# Altium PCB 8x8x8 LED Cube.PcbDoc
Units mil, origin at the board's own origin, x right, y up, seen from the top; angles counter-clockwise.
Board outline 5000 x 7260 mil, 2 copper layers (Top Layer, Bottom Layer); 117 components, 176 nets, 512 pads, 77 vias.
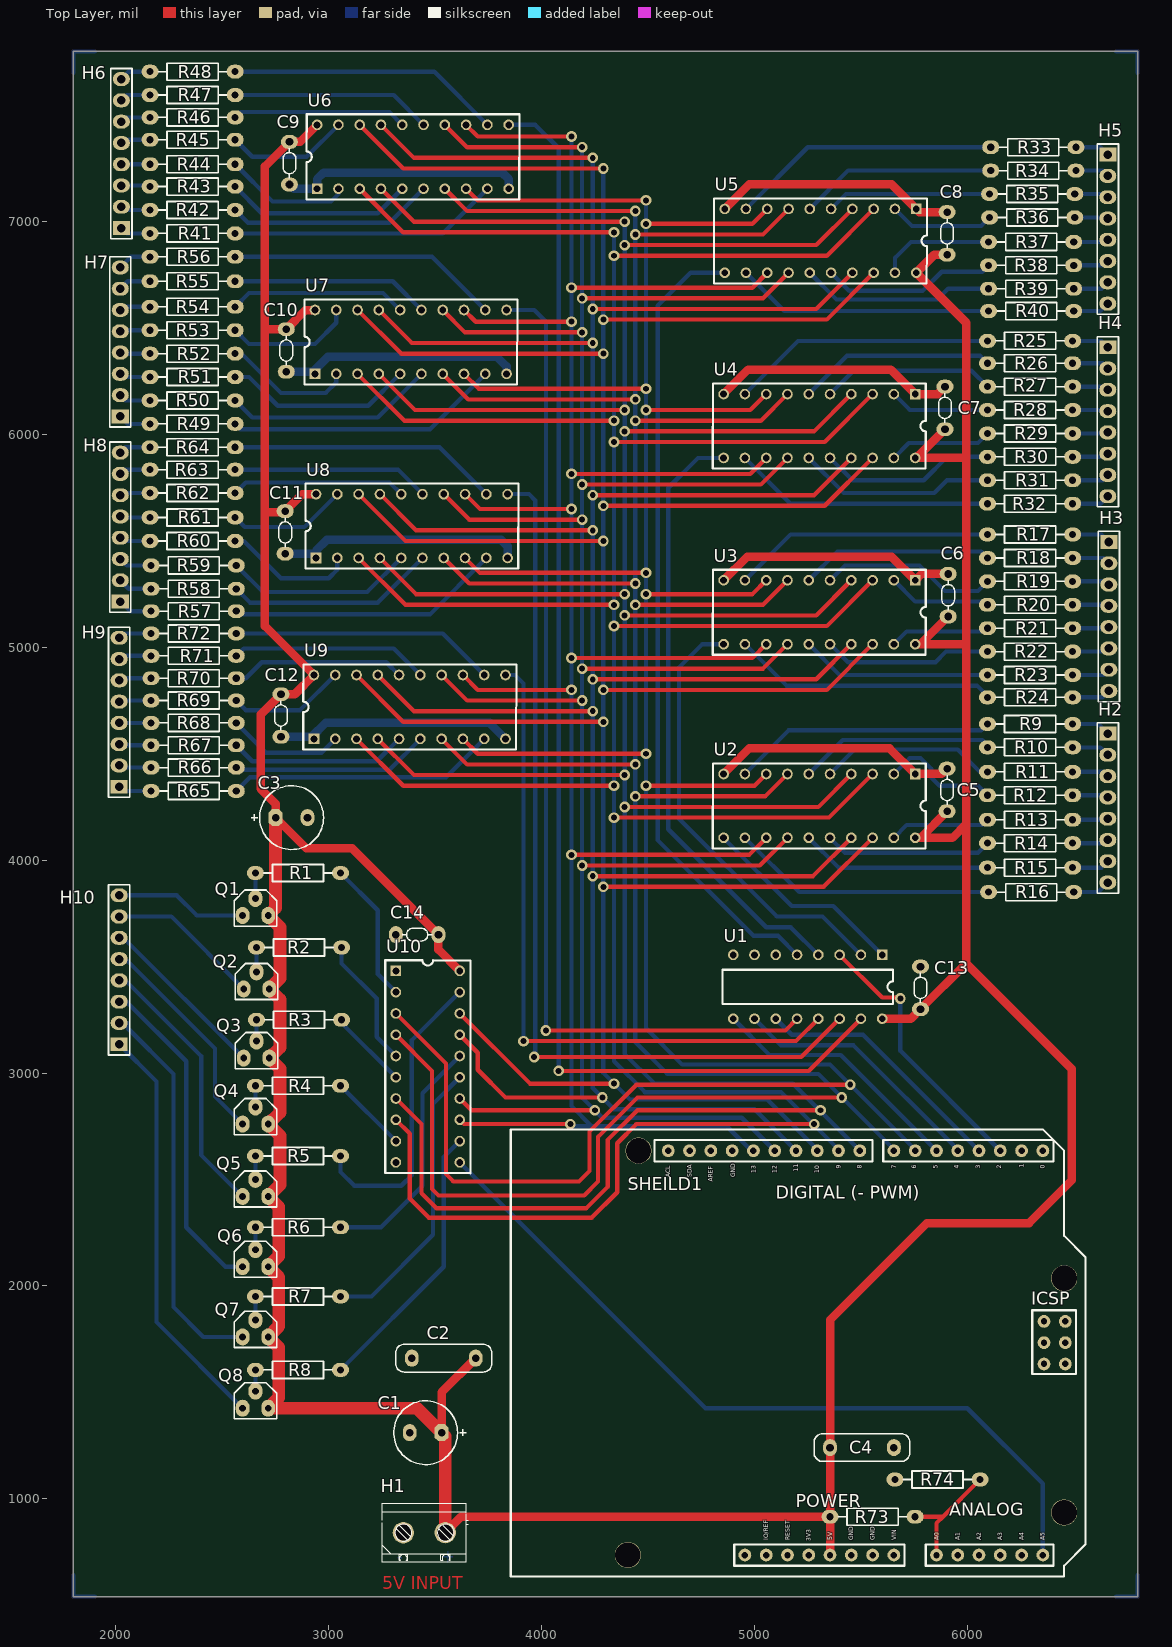
[diagram p0: Top Layer view]
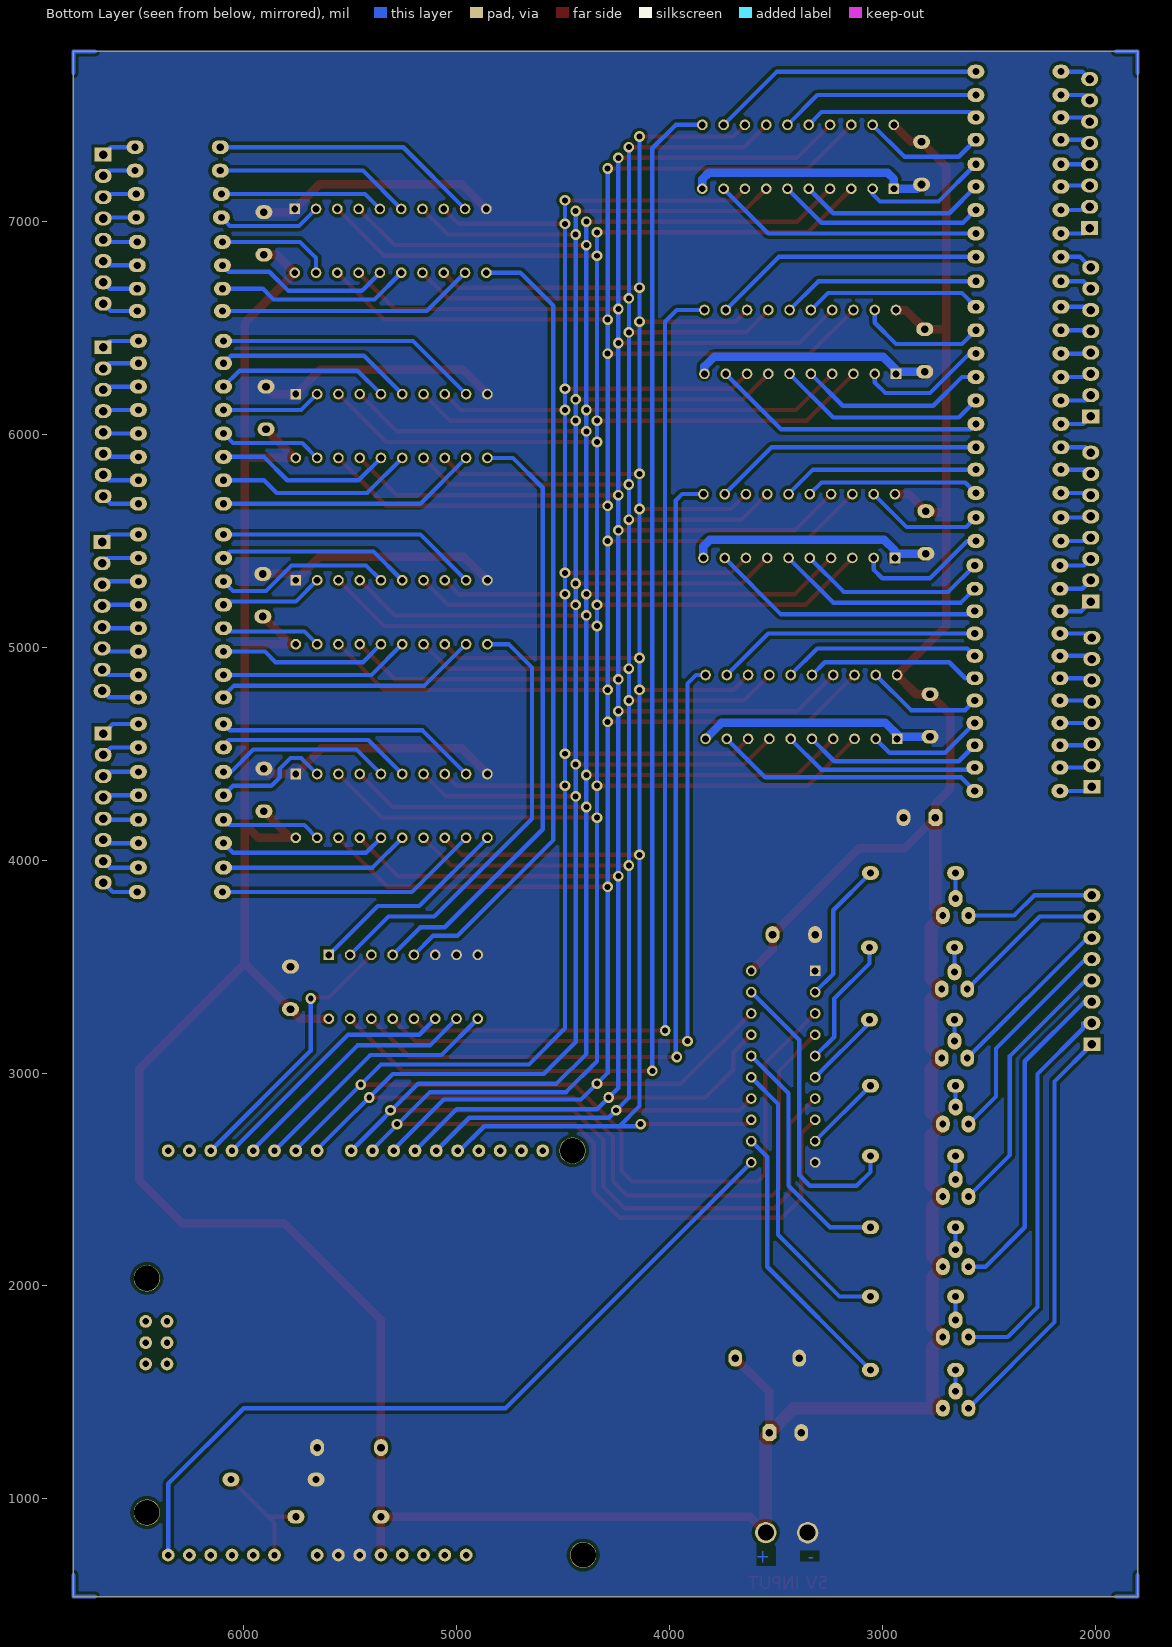
[diagram p1: Bottom Layer view, seen from below]

## Layer stack, top to bottom
Top Layer: signal copper 1.4
Dielectric: dielectric 12.6, FR-4, Dk 4.8
Bottom Layer: signal copper 1.4

## Board outline
1800,7800 6800,7800 6800,540 1800,540

## Design rules (kind name [scope] priority, off if disabled: settings)
Clearance [All] p1: gap=15
PlaneConnect [All] p1: planeconnectstyle=Relief reliefexpansion=20 reliefentries=4 reliefconductorwidth=12 reliefairgap=10
PolygonConnect [All] p1: connectstyle=Direct reliefconductorwidth=10 reliefentries=4 polygonreliefangle="90 Angle"
RoutingVias [All] p1: holewidth=28 width=50 viastyle="Through Hole" minholewidth=28 minwidth=50 maxholewidth=28 maxwidth=50
SilkscreenOverComponentPads [All] p1: minsilkscreentomaskgap=10
SolderMaskExpansion [All] p1: expansion=4
Width GND [InNet('GND')] p1: maxlimit=100 minlimit=20 preferedwidth=40
Width VCC [InNet('VCC')] p2: maxlimit=80 minlimit=20 preferedwidth=40
Width [All] p3: maxlimit=40 minlimit=10 preferedwidth=20
26 further rules are at their usual default settings.

## Components (designator, comment, footprint, x,y, rotation, side; value= is the part's Value field where it differs from the comment)
C1 "Cap Pol1" RB.15/.3 3530,1310 r180 top
C2 "Cap" RAD300 3690,1660 r180 top
C3 "Cap Pol1" RB.15/.3 2750,4200 r0 top
C4 "Cap" RAD300 5655,1240 r180 top
C5 "Cap" RAD200_A 5905,4430 r270 top
C6 "Cap" RAD200_A 5910,5345 r270 top
C7 "Cap" RAD200_A 5895,6225 r270 top
C8 "Cap" RAD200_A 5905,7045 r270 top
C9 "Cap" RAD200_A 2815,7175 r90 top
C10 "Cap" RAD200_A 2800,6295 r90 top
C11 "Cap" RAD200_A 2795,5440 r90 top
C12 "Cap" RAD200_A 2775,4580 r90 top
C13 "Cap" RAD200_A 5780,3500 r270 top
C14 "Cap" RAD200_A 3315,3650 r0 top
H1 "PRKR2" PRKR2 3350,840 r270 top
H2 "Header 98" HDR1X8 6660,4595 r270 top
H3 "Header 98" HDR1X8 6665,5495 r270 top
H4 "Header 98" HDR1X8 6660,6410 r270 top
H5 "Header 98" HDR1X8 6660,7315 r270 top
H6 "Header 98" HDR1X8 2025,6970 r90 top
H7 "Header 98" HDR1X8 2020,6085 r90 top
H8 "Header 98" HDR1X8 2020,5215 r90 top
H9 "Header 98" HDR1X8 2015,4345 r90 top
H10 "Header 98" HDR1X8 2015,3135 r90 top
Q1 "BC327-16" TO-92A 2655,3810 r180 top
Q2 "BC327-16" TO-92A 2660,3465 r180 top
Q3 "BC327-16" TO-92A 2660,3140 r180 top
Q4 "BC327-16" TO-92A 2655,2830 r180 top
Q5 "BC327-16" TO-92A 2655,2490 r180 top
Q6 "BC327-16" TO-92A 2655,2160 r180 top
Q7 "BC327-16" TO-92A 2655,1830 r180 top
Q8 "BC327-16" TO-92A 2655,1495 r180 top
R1 "Res1" AXIAL400 2855,3940 r180 top
R2 "Res1" AXIAL400 2860,3590 r180 top
R3 "Res1" AXIAL400 2860,3250 r180 top
R4 "Res1" AXIAL400 2855,2940 r180 top
R5 "Res1" AXIAL400 2855,2610 r180 top
R6 "Res1" AXIAL400 2855,2275 r180 top
R7 "Res1" AXIAL400 2855,1950 r180 top
R8 "Res1" AXIAL400 2855,1605 r180 top
R9 "Res1" AXIAL400 6295,4640 r180 top
R10 "Res1" AXIAL400 6295,4530 r180 top
R11 "Res1" AXIAL400 6295,4415 r180 top
R12 "Res1" AXIAL400 6295,4305 r180 top
R13 "Res1" AXIAL400 6295,4190 r180 top
R14 "Res1" AXIAL400 6295,4080 r180 top
R15 "Res1" AXIAL400 6295,3965 r180 top
R16 "Res1" AXIAL400 6300,3850 r180 top
R17 "Res1" AXIAL400 6295,5530 r180 top
R18 "Res1" AXIAL400 6295,5420 r180 top
R19 "Res1" AXIAL400 6295,5310 r180 top
R20 "Res1" AXIAL400 6295,5200 r180 top
R21 "Res1" AXIAL400 6295,5090 r180 top
R22 "Res1" AXIAL400 6295,4980 r180 top
R23 "Res1" AXIAL400 6295,4870 r180 top
R24 "Res1" AXIAL400 6295,4765 r180 top
R25 "Res1" AXIAL400 6295,6440 r180 top
R26 "Res1" AXIAL400 6295,6335 r180 top
R27 "Res1" AXIAL400 6295,6225 r180 top
R28 "Res1" AXIAL400 6295,6115 r180 top
R29 "Res1" AXIAL400 6295,6005 r180 top
R30 "Res1" AXIAL400 6295,5895 r180 top
R31 "Res1" AXIAL400 6295,5785 r180 top
R32 "Res1" AXIAL400 6295,5675 r180 top
R33 "Res1" AXIAL400 6310,7350 r180 top
R34 "Res1" AXIAL400 6310,7240 r180 top
R35 "Res1" AXIAL400 6305,7130 r180 top
R36 "Res1" AXIAL400 6305,7020 r180 top
R37 "Res1" AXIAL400 6300,6905 r180 top
R38 "Res1" AXIAL400 6300,6795 r180 top
R39 "Res1" AXIAL400 6300,6685 r180 top
R40 "Res1" AXIAL400 6300,6580 r180 top
R41 "Res1" AXIAL400 2360,6945 r0 top
R42 "Res1" AXIAL400 2360,7055 r0 top
R43 "Res1" AXIAL400 2360,7165 r0 top
R44 "Res1" AXIAL400 2360,7270 r0 top
R45 "Res1" AXIAL400 2360,7385 r0 top
R46 "Res1" AXIAL400 2360,7490 r0 top
R47 "Res1" AXIAL400 2360,7595 r0 top
R48 "Res1" AXIAL400 2360,7705 r0 top
R49 "Res1" AXIAL400 2360,6050 r0 top
R50 "Res1" AXIAL400 2360,6160 r0 top
R51 "Res1" AXIAL400 2360,6270 r0 top
R52 "Res1" AXIAL400 2360,6380 r0 top
R53 "Res1" AXIAL400 2360,6490 r0 top
R54 "Res1" AXIAL400 2360,6600 r0 top
R55 "Res1" AXIAL400 2360,6720 r0 top
R56 "Res1" AXIAL400 2360,6835 r0 top
R57 "Res1" AXIAL400 2365,5170 r0 top
R58 "Res1" AXIAL400 2365,5275 r0 top
R59 "Res1" AXIAL400 2365,5385 r0 top
R60 "Res1" AXIAL400 2360,5500 r0 top
R61 "Res1" AXIAL400 2360,5610 r0 top
R62 "Res1" AXIAL400 2360,5725 r0 top
R63 "Res1" AXIAL400 2360,5835 r0 top
R64 "Res1" AXIAL400 2360,5940 r0 top
R65 "Res1" AXIAL400 2365,4325 r0 top
R66 "Res1" AXIAL400 2365,4435 r0 top
R67 "Res1" AXIAL400 2365,4540 r0 top
R68 "Res1" AXIAL400 2365,4645 r0 top
R69 "Res1" AXIAL400 2365,4750 r0 top
R70 "Res1" AXIAL400 2365,4855 r0 top
R71 "Res1" AXIAL400 2365,4960 r0 top
R72 "Res1" AXIAL400 2365,5065 r0 top
R73 "Res1" AXIAL400 5555,915 r180 top
R74 "Res1" AXIAL400 5860,1090 r0 top
SHEILD1 "Arduino UNO sheild" "Arduino UNO R3" 3855,635 r0 top
U1 "CD4051 - 8 channel analog multiplexer" DIP16 5600,3555 r270 top
U2 "HEF40373BP - Ocatal D type latch" DIP20 5755,4405 r270 top
U3 "HEF40373BP - Ocatal D type latch" DIP20 5755,5315 r270 top
U4 "HEF40373BP - Ocatal D type latch" DIP20 5755,6190 r270 top
U5 "HEF40373BP - Ocatal D type latch" DIP20 5760,7060 r270 top
U6 "HEF40373BP - Ocatal D type latch" DIP20 2945,7155 r90 top
U7 "HEF40373BP - Ocatal D type latch" DIP20 2935,6285 r90 top
U8 "HEF40373BP - Ocatal D type latch" DIP20 2940,5420 r90 top
U9 "HEF40373BP - Ocatal D type latch" DIP20 2930,4570 r90 top
U10 "HEF40373BP - Ocatal D type latch" DIP20 3315,3480 r0 top

## Footprints (in the part's own frame and the unit in brackets; to place one, negate y for a bottom-side part, rotate by r counter-clockwise, add the part's x,y. Pads: shape width x height; smd on the part's side, far side on the other; paste and mask are expansions set on the pad)
"Arduino UNO R3" [mil]
  round 60 hole 30: 1(1100,100) 2(1200,100) 3(1300,100) 4(1400,100) 5(1500,100) 6(1600,100) 7(1700,100) 8(1800,100) 9(2000,100) 10(2100,100) 11(2200,100) 12(2300,100) 13(2400,100) 14(2500,100) 15(2500,2000) 16(2400,2000) 17(2300,2000) 18(2200,2000) 19(2100,2000) 20(2000,2000) 21(1900,2000) 22(1800,2000) 23(1640,2000) 24(1540,2000) 25(1440,2000) 26(1340,2000) 27(1240,2000) 28(1140,2000) 29(1040,2000) 30(940,2000) 31(840,2000) 32(740,2000) 33(2505.51,998.03) 34(2605.51,998.03) 35(2505.51,1098.03) 36(2605.51,1098.03) 37(2605.51,1198.03) 38(2505.51,1198.03)
  round 123 hole 119: 39(550,100) 40(2600,300) 41(2600,1400) 42(600,2000)
  silkscreen extent 0,0 2700,2100
AXIAL400 [mil]
  oval 80x65 hole 33.46: 1(-200,0) 2(200,0)
  silkscreen extent -160,-40 160,40
DIP16 [mil]
  rect 50x50 hole 32: 1(0,0)
  round 50 hole 32: 2(0,-100) 3(0,-200) 4(0,-300) 5(0,-400) 6(0,-500) 7(0,-600) 8(0,-700) 9(300,-700) 10(300,-600) 11(300,-500) 12(300,-400) 13(300,-300) 14(300,-200) 15(300,-100) 16(300,0)
  silkscreen extent 70,-750 230,50
DIP20 [mil]
  rect 50x50 hole 32: 1(0,0)
  round 50 hole 32: 2(0,-100) 3(0,-200) 4(0,-300) 5(0,-400) 6(0,-500) 7(0,-600) 8(0,-700) 9(0,-800) 10(0,-900) 11(300,-900) 12(300,-800) 13(300,-700) 14(300,-600) 15(300,-500) 16(300,-400) 17(300,-300) 18(300,-200) 19(300,-100) 20(300,0)
  silkscreen extent -50,-951 350,50
HDR1X8 [mil]
  rect 65x80 hole 40: 1(0,0)
  oval 65x80 hole 40: 2(100,0) 3(200,0) 4(300,0) 5(400,0) 6(500,0) 7(600,0) 8(700,0)
  silkscreen extent -50,-50 750,50
PRKR2 [mil]
  round 100 hole 75: 1(0,0) 2(-0.24,196.82)
  silkscreen extent -138,-98 138,305, body extent -160,-115 160,309, height 398
RAD200_A [mil]
  oval 65x80 hole 36: 1(0,0) 2(200,0)
  silkscreen extent 30,-30 170,30
RAD300 [mil]
  oval 65x80 hole 36: 1(0,0) 2(300,0)
  silkscreen extent -75,-65 375,65
RB.15/.3 [mil]
  oct 65x80 hole 36: 1(0,0)
  oval 65x80 hole 36: 2(150,0)
  silkscreen extent -115,-150 225,150
TO-92A [mil]
  oval 65x80 hole 32: 1(60,70) 2(0,-10) 3(-60,70)
  silkscreen extent -100,-50 100,120

## Part data
C1 C3: "Polarized Capacitor (Radial)"
C2 C4 C5 C6 C7 C8 C9 C10 C11 C12 C13 C14: "Capacitor"
H1: "SCREW TERMINAL 5MM"
H2 H3 H4 H5 H6 H7 H8 H9 H10: library part "Header 8", "Header, 8-Pin"
Q1 Q2 Q3 Q4 Q5 Q6 Q7 Q8: "PNP BJT"
R1 R2 R3 R4 R5 R6 R7 R8 R9 R10 R11 R12 R13 R14 R15 R16 R17 R18 R19 R20 R21 R22 R23 R24 R25 R26 R27 R28 R29 R30 R31 R32 R33 R34 R35 R36 R37 R38 R39 R40 R41 R42 R43 R44 R45 R46 R47 R48 R49 R50 R51 R52 R53 R54 R55 R56 R57 R58 R59 R60 R61 R62 R63 R64 R65 R66 R67 R68 R69 R70 R71 R72 R73 R74: "Resistor"

## Via types
v1: diameter 50, hole 28, Top Layer to Bottom Layer, 77 vias

## Nets (pads, with @x,y where several pads share a name; then routed paths per layer and width w, separated by ;. In a path a pad name is that pad's centre, name@x,y a point inside that pad or via, vN(x,y) a via of type N, cw(c..) or ccw(c..) an arc to the next point about the centre after c; other vN are vias at no path point)
"0.5 VCC": R73.1 R74.2 SHEILD1.9 | length 569.9
  Top Layer w20: R73.1 5885,915 ; SHEILD1.9 5855,885 5885,915 ; R74.2 5885,915
A: SHEILD1.18 U1.11 | length 1211.8
  Bottom Layer w20: U1.11 5175,3180 5510,3180 SHEILD1.18
B: SHEILD1.19 U1.10 | length 1214.7
  Bottom Layer w20: U1.10 5125,3130 5465,3130 5955,2640 SHEILD1.19
C: SHEILD1.20 U1.9 | length 1211.8
  Bottom Layer w20: U1.9 5070,3085 5405,3085 SHEILD1.20
COM: SHEILD1.17 U1.3 | length 1282.5
  Top Layer w20: U1.3 5600,3355 5685,3355 v1(5685,3350)
  Bottom Layer w20: v1(5685,3350) 5685,3105 SHEILD1.17
E0: U1.1 U2.11 | length 972.8
  Bottom Layer w20: U2.11 5175,3785 5370,3785 U1.1
E1: U1.2 U3.11 | length 2085.7
  Bottom Layer w20: U3.11 4755,5015 4645,4905 4645,4195 5105,3735 5320,3735 U1.2
E2: U1.4 U4.11 | length 2872.4
  Bottom Layer w20: U4.11 4735,5890 4595,5750 4595,4145 5055,3685 5170,3685 U1.4
E3: U1.5 U5.11 | length 3767.9
  Bottom Layer w20: U5.11 4700,6760 4545,6605 4545,4095 4995,3645 5110,3645 U1.5
E4: U1.15 U6.11 | length 6137
  Top Layer w20: v1(4080,3010) 5255,3010 U1.15
  Bottom Layer w20: U6.11 3970,7455 4080,7345 v1(4080,3010)
E5: U1.12 U7.11 | length 4740.6
  Top Layer w20: v1(4020,3200) 5145,3200 U1.12
  Bottom Layer w20: U7.11 3965,6585 4020,6530 v1(4020,3200)
E6: U1.14 U8.11 | length 4269.1
  Top Layer w20: v1(3965,3075) 5220,3075 U1.14
  Bottom Layer w20: U8.11 3940,5720 3970,5690 3970,3100 v1@3965,3095 ; v1(3965,3075) v1@3985,3075
E7: U1.13 U9.11 | length 3210.1
  Top Layer w20: v1(3915,3150) 5195,3150 U1.13
  Bottom Layer w20: U9.11 3875,4870 3915,4830 v1(3915,3150)
E8: SHEILD1.14 U10.11 | length 3700.5
  Bottom Layer w20: U10.11 4770,1425 6000,1425 6355,1070 SHEILD1.14
GND: C1.2 C2.2 C3.2 C4.1 C5.1 C6.1 C7.1 C8.1 C9.1 C10.1 C11.1 C12.1 C13.1 C14.1 H1.1 R74.1 SHEILD1.6 SHEILD1.7 U1.6 U1.7 U1.8 U2.1 U2.10 U3.1 U3.10 U4.1 U4.10 U5.1 U5.10 U6.1 U6.10 U7.1 U7.10 U8.1 U8.10 U9.1 U9.10 U10.1 U10.10 | length 9174.8
  Top Layer w40: U2.10 4975,4525 5635,4525 U2.1 5880,4405 C5.1 ; U3.10 4965,5425 5645,5425 U3.1 5785,5345 C6.1 ; U4.10 4970,6305 5640,6305 U4.1 5860,6190 C7.1 ; U5.10 4975,7175 5645,7175 U5.1 5775,7045 C8.1
  Bottom Layer w40: C12.1 2920,4580 2985,4645 3755,4645 U9.10 ; C11.1 2920,5440 U8.1 2940,5455 2990,5505 3810,5505 3840,5475 U8.10 ; C10.1 2925,6295 2995,6365 3790,6365 3835,6320 U7.10 ; C9.1 2835,7155 U6.1 2945,7200 2975,7230 3815,7230 3845,7200 U6.10
LED0: SHEILD1.21 U2.8 U3.8 U4.8 U5.8 U6.8 U7.8 U8.8 U9.8 U10.3 | length 14354.3
  Top Layer w20: U10.3 3550,3045 3550,2525 3585,2490 4175,2490 4225,2540 4225,2725 4445,2945 v1(5450,2945) ; U9.8 3700,4500 v1(4490,4500) ; U7.8 3705,6215 v1(4490,6215) ; U8.8 3710,5350 v1(4490,5350) ; U6.8 3700,7100 v1(4490,7100) ; v1(4490,4350) 5000,4350 U2.8 ; v1(4490,5250) 4990,5250 U3.8 ; v1(4490,6115) 4980,6115 U4.8 ; v1(4490,6990) 4990,6990 U5.8
  Bottom Layer w20: v1(4490,7100) v1(4490,6990) v1(4490,6115) v1(4490,5250) v1(4490,4350) 4490,3210 4660,3040 5355,3040 5755,2640 SHEILD1.21
LED00P: R9.2 U2.9 | length 1237.3
  Bottom Layer w20: U2.9 5160,4610 6065,4610 R9.2
LED1: SHEILD1.22 U2.7 U3.7 U4.7 U5.7 U6.7 U7.7 U8.7 U9.7 U10.4 | length 15240.5
  Top Layer w20: U10.4 3485,3010 3485,2455 3515,2425 4200,2425 4265,2490 4265,2700 4450,2885 v1(5410,2885) ; U9.7 3650,4450 v1(4440,4450) ; U7.7 3655,6165 v1(4440,6165) ; U8.7 3660,5300 v1(4440,5300) ; U6.7 3650,7050 v1(4440,7050) ; v1(4440,4300) 5050,4300 U2.7 ; v1(4440,5200) 5040,5200 U3.7 ; v1(4440,6065) 5030,6065 U4.7 ; v1(4440,6940) 5040,6940 U5.7
  Bottom Layer w20: v1(4440,7050) v1(4440,6940) v1(4440,6065) v1(4440,5200) v1(4440,4300) 4440,3145.5 4590.5,2995 5300,2995 5655,2640 SHEILD1.22
LED01P: R10.2 U2.6 | length 916.6
  Bottom Layer w20: U2.6 5415,4565 6070,4565 R10.2@6095,4540
LED2: SHEILD1.23 U2.4 U3.4 U4.4 U5.4 U6.4 U7.4 U8.4 U9.4 U10.7 | length 17347.5
  Top Layer w20: U9.4 3400,4400 v1(4390,4400) ; U7.4 3405,6115 v1(4390,6115) ; U8.4 3410,5250 v1(4390,5250) ; U6.4 3400,7000 v1(4390,7000) ; U10.7 3435,2760 3435,2435 3505,2365 4210,2365 4310,2465 4310,2685 4450,2825 v1(5310,2825) ; v1(4390,4250) 5300,4250 U2.4 ; v1(4390,5150) 5290,5150 U3.4 ; v1(4390,6015) 5280,6015 U4.4 ; v1(4390,6890) 5290,6890 U5.4
  Bottom Layer w20: v1(4390,7000) v1(4390,6890) v1(4390,6015) v1(4390,5150) v1(4390,4250) 4390,3090 4530,2950 5180,2950 SHEILD1.23
LED02P: R11.2 U2.5 | length 856.1
  Bottom Layer w20: U2.5 5470,4520 5955,4520 6060,4415 R11.2 ; R11.2@6087.5,4407.5 R11.2@6087.5,4432.5
LED3: SHEILD1.24 U2.3 U3.3 U4.3 U5.3 U6.3 U7.3 U8.3 U9.3 U10.8 | length 18169.7
  Top Layer w20: U9.3 3350,4350 v1(4340,4350) ; U7.3 3355,6065 v1(4340,6065) ; U8.3 3360,5200 v1(4340,5200) ; U6.3 3350,6950 v1(4340,6950) ; U10.8 3380,2715 3380,2410 3470,2320 4235,2320 4355,2440 4355,2670 4445,2760 v1(5280,2760) ; v1(4340,4200) 5350,4200 U2.3 ; v1(4340,5100) 5340,5100 U3.3 ; v1(4340,5965) 5330,5965 U4.3 ; v1(4340,6840) 5340,6840 U5.3
  Bottom Layer w20: v1(4340,6950) v1(4340,6840) v1(4340,5965) v1(4340,5100) v1(4340,4200) 4340,3055 4485,2910 5125,2910 5395,2640 SHEILD1.24
LED03P: R12.2 U2.2 | length 577
  Bottom Layer w20: U2.2 5730,4480 5780,4480 5830,4430 5830,4390 5870,4350 6050,4350 R12.2 R12.2@6085,4305
LED4: SHEILD1.25 U2.18 U3.18 U4.18 U5.18 U6.18 U7.18 U8.18 U9.18 U10.18 | length 16666.5
  Top Layer w20: U9.18 3350,4650 v1(4290,4650) ; U7.18 3340,6380 v1(4290,6380) ; U8.18 3360,5500 v1(4290,5500) ; U6.18 3350,7250 v1(4290,7250) ; U10.18 3945,2950 v1(4340,2950) ; v1(4290,3875) 5325,3875 U2.18 ; v1(4290,4800) 5340,4800 U3.18 ; v1(4290,5665) 5330,5665 U4.18 ; v1(4290,6540) 5340,6540 U5.18
  Bottom Layer w20: v1(4290,7250) v1(4290,6540) v1(4290,5665) v1(4290,4800) v1(4290,3875) 4290,3000 4415,2875 5060,2875 5295,2640 SHEILD1.25
LED04P: R13.2 U2.19 | length 475.2
  Bottom Layer w20: U2.19 5715,4165 6070,4165 R13.2
LED5: SHEILD1.26 U2.17 U3.17 U4.17 U5.17 U6.17 U7.17 U8.17 U9.17 U10.17 | length 15711.3
  Top Layer w20: U9.17 3400,4700 v1(4240,4700) ; U7.17 3390,6430 v1(4240,6430) ; U8.17 3410,5550 v1(4240,5550) ; U6.17 3400,7300 v1(4240,7300) ; U10.17 3700,3095 3700,3015 3830,2885 v1@4280,2885 ; v1(4240,3925) 5275,3925 U2.17 ; v1(4240,4850) 5290,4850 U3.17 ; v1(4240,5715) 5280,5715 U4.17 ; v1(4240,6590) 5290,6590 U5.17
  Bottom Layer w20: v1(4240,7300) v1(4240,6590) v1(4240,5715) v1(4240,4850) v1(4240,3925) 4240,2930 4340,2830 5000,2830 SHEILD1.26
  other v1: 4285,2885
LED05P: R14.2 U2.16 | length 787.6
  Bottom Layer w20: U2.16 5425,4035 6050,4035 R14.2
LED6: SHEILD1.27 U2.14 U3.14 U4.14 U5.14 U6.14 U7.14 U8.14 U9.14 U10.14 | length 13010.7
  Top Layer w20: U9.14 3650,4750 v1(4190,4750) ; U7.14 3640,6480 v1(4190,6480) ; U8.14 3660,5600 v1(4190,5600) ; U6.14 3650,7350 v1(4190,7350) ; U10.14 3670,2825 v1(4250,2825) ; v1(4190,3975) 5025,3975 U2.14 U2.14@5155,4120 ; v1(4190,4900) 5040,4900 U3.14 ; v1(4190,5765) 5030,5765 U4.14 ; v1(4190,6640) 5040,6640 U5.14
  Bottom Layer w20: v1(4190,7350) v1(4190,6640) v1(4190,5765) v1(4190,4900) v1(4190,3975) 4190,2885 4285,2790 4940,2790 SHEILD1.27
LED06P: R15.2 U2.15 | length 898
  Bottom Layer w20: U2.15 5395,3965 R15.2
LED7: SHEILD1.28 U2.13 U3.13 U4.13 U5.13 U6.13 U7.13 U8.13 U9.13 U10.13 | length 12025.2
  Top Layer w20: U10.13 3635,2760 v1(4135,2760) ; U9.13 3700,4800 v1(4140,4800) ; U7.13 3690,6530 v1(4140,6530) ; U8.13 3710,5650 v1(4140,5650) ; U6.13 3700,7400 v1(4140,7400) ; v1(4140,4025) 4975,4025 U2.13 ; v1(4140,4950) 4990,4950 U3.13 ; v1(4140,5815) 4980,5815 U4.13 ; v1(4140,6690) 4990,6690 U5.13
  Bottom Layer w20: v1(4135,2760) 4145,2750 4870,2750 SHEILD1.28@4990,2630 ; v1(4140,7400) v1(4140,6690) v1(4140,5815) v1(4140,4950) v1(4140,4025) 4140,2845 4235,2750
LED07P: R16.2 U2.12 | length 1250.6
  Bottom Layer w20: U2.12 5210,3850 R16.2
LED10P: R17.2 U3.9 | length 1229.1
  Bottom Layer w20: U3.9 5170,5530 R17.2
LED11P: R18.2 U3.6 | length 908.3
  Bottom Layer w20: U3.6 5390,5450 6065,5450 R18.2
LED12P: R19.2 U3.5 | length 837.3
  Bottom Layer w20: U3.5 5425,5385 5775,5385 5895,5265 6050,5265 R19.2
LED13P: R20.2 U3.2 | length 487.6
  Bottom Layer w20: U3.2 5755,5215 6080,5215 R20.2
LED14P: R21.2 U3.19 | length 476.1
  Bottom Layer w20: U3.19 5715,5075 6085,5075 R21.2@6100,5090
LED15P: R22.2 U3.16 | length 795.9
  Bottom Layer w20: U3.16 5440,4930 5850,4930 5900,4980 R22.2
LED16P: R23.2 U3.15 | length 900.1
  Bottom Layer w20: U3.15 5400,4870 R23.2
LED17P: R24.2 U3.12 | length 1246.5
  Bottom Layer w20: U3.12 5150,4820 6045,4820 6095,4770 R24.2
LED20P: R25.2 U4.9 | length 1243.6
  Bottom Layer w20: U4.9 5205,6440 R25.2
LED21P: R26.2 U4.6 | length 929.1
  Bottom Layer w20: U4.6 5435,6370 6060,6370 R26.2
LED22P: R27.2 U4.5 | length 816.6
  Bottom Layer w20: U4.5 5465,6300 6020,6300 R27.2
LED23P: R28.2 U4.2 | length 471.1
  Bottom Layer w20: U4.2 5730,6115 R28.2
LED24P: R29.2 U4.19 | length 487.6
  Bottom Layer w20: U4.19 5725,5960 6050,5960 R29.2
LED25P: R30.2 U4.16 | length 829.1
  Bottom Layer w20: U4.16 5460,5785 5795,5785 5905,5895 R30.2
LED26P: R31.2 U4.15 | length 933.2
  Bottom Layer w20: U4.15 5420,5725 5845,5725 5905,5785 R31.2
LED27P: R32.2 U4.12 | length 1229.1
  Bottom Layer w20: U4.12 5170,5675 R32.2
LED30P: R33.2 U5.9 | length 1270.1
  Bottom Layer w20: U5.9 5250,7350 R33.2
LED31P: R34.2 U5.6 | length 924.6
  Bottom Layer w20: U5.6 5440,7240 R34.2
LED32P: R35.2 U5.5 | length 774
  Bottom Layer w20: U5.5 5430,7130 R35.2
LED33P: R36.2 U5.2 | length 494.7
  Bottom Layer w20: U5.2 5740,6980 6065,6980 R36.2
LED34P: R37.2 U5.19 | length 541.1
  Bottom Layer w20: U5.19 5660,6830 5735,6905 R37.2
LED35P: R38.2 U5.16 | length 824.9
  Bottom Layer w20: U5.16 5445,6675 5790,6675 5880,6765 6070,6765 R38.2
LED36P: R39.2 U5.15 | length 912.5
  Bottom Layer w20: U5.15 5385,6635 5860,6635 5910,6685 R39.2
LED37P: R40.2 U5.12 | length 1214.6
  Bottom Layer w20: U5.12 5140,6580 R40.2
LED40P: R41.2 U6.9 | length 1272
  Bottom Layer w20: R41.2 3535,6945 U6.9
LED41P: R42.2 U6.6 | length 976.1
  Bottom Layer w20: R42.2 2620,6995 3285,6995 U6.6
LED42P: R43.2 U6.5 | length 884.4
  Bottom Layer w20: R43.2 2685,7040 3230,7040 U6.5
LED43P: R44.2 U6.2 | length 597
  Bottom Layer w20: R44.2 2735,7095 3010,7095 3045,7130 U6.2
LED44P: R45.2 U6.19 | length 580.3
  Bottom Layer w20: R45.2 2640,7305 2895,7305 U6.19
LED45P: R46.2 U6.16 | length 820.2
  Bottom Layer w20: R46.2 2585,7515 3285,7515 U6.16
LED46P: R47.2 U6.15 | length 943
  Bottom Layer w20: R47.2 3305,7595 U6.15
LED47P: R48.2 U6.12 | length 1288.6
  Bottom Layer w20: R48.2 3495,7705 U6.12
LED50P: R49.2 U7.9 | length 1293.1
  Bottom Layer w20: R49.2 2585,6025 3475,6025 U7.9
LED51P: R50.2 U7.6 | length 993.1
  Bottom Layer w20: R50.2 2640,6080 3230,6080 U7.6
LED52P: R51.2 U7.5 | length 893.1
  Bottom Layer w20: R51.2 2625,6270 2760,6135 3185,6135 U7.5
LED53P: R52.2 U7.2 | length 612.3
  Bottom Layer w20: R52.2 2590,6380 2775,6195 2985,6195 3035,6245 U7.2
LED54P: R53.2 U7.19 | length 603.3
  Bottom Layer w20: R53.2 2625,6425 2935,6425 3035,6525 U7.19
LED55P: R54.2 U7.16 | length 835.1
  Bottom Layer w20: R54.2 2625,6665 3255,6665 U7.16
LED56P: R55.2 U7.15 | length 930.9
  Bottom Layer w20: R55.2 3300,6720 U7.15
LED57P: R56.2 U7.12 | length 1278.6
  Bottom Layer w20: R56.2 3485,6835 U7.12
LED60P: R57.2 U8.9 | length 1291
  Bottom Layer w20: R57.2 2580,5155 3475,5155 U8.9
LED61P: R58.2 U8.6 | length 988.9
  Bottom Layer w20: R58.2 2630,5210 3230,5210 U8.6
LED62P: R59.2 U8.5 | length 893.1
  Bottom Layer w20: R59.2 2690,5260 3180,5260 U8.5
LED63P: R60.2 U8.2 | length 624.1
  Bottom Layer w20: R60.2 2600,5500 2775,5325 3000,5325 3040,5365 U8.2
LED64P: R61.2 U8.19 | length 562.8
  Bottom Layer w20: R61.2 2605,5565 2885,5565 U8.19
LED65P: R62.2 U8.16 | length 823.5
  Bottom Layer w20: R62.2 2610,5775 3285,5775 U8.16
LED66P: R63.2 U8.15 | length 927.6
  Bottom Layer w20: R63.2 3325,5835 U8.15
LED67P: R64.2 U8.12 | length 1271.1
  Bottom Layer w20: R64.2 3520,5940 U8.12
LED70P: R65.2 U9.9 | length 1266.5
  Bottom Layer w20: R65.2 2630,4390 3550,4390 U9.9
LED71P: R66.2 U9.6 | length 929.2
  Bottom Layer w20: R66.2 2575,4425 3285,4425 U9.6
LED72P: R67.2 U9.5 | length 839.6
  Bottom Layer w20: R67.2 2640,4465 3225,4465 U9.5
LED73P: R68.2 U9.2 | length 549.9
  Bottom Layer w20: R68.2 2705,4505 2965,4505 U9.2
LED74P: R69.2 U9.19 | length 552
  Bottom Layer w20: R69.2 2610,4705 2865,4705 U9.19
LED75P: R70.2 U9.16 | length 820.9
  Bottom Layer w20: R70.2 2610,4855 2685,4930 3270,4930 U9.16
LED76P: R71.2 U9.15 | length 931.3
  Bottom Layer w20: R71.2 2600,4995 3305,4995 U9.15
LED77P: R72.2 U9.12 | length 1245.8
  Bottom Layer w20: R72.2 3535,5065 U9.12
NetH2_1: H2.1 R9.1 | length 183.6
  Bottom Layer w20: R9.1 6615,4640 H2.1
NetH2_2: H2.2 R10.1 | length 179.5
  Bottom Layer w20: R10.1 6625,4530 H2.2
NetH2_3: H2.3 R11.1 | length 173.3
  Bottom Layer w20: R11.1 6640,4415 H2.3
NetH2_4: H2.4 R12.1 | length 169.1
  Bottom Layer w20: R12.1 6650,4305 H2.4
NetH2_5: H2.5 R13.1 | length 167.1
  Bottom Layer w20: R13.1 6655,4190 H2.5
NetH2_6: H2.6 R14.1 | length 171.2
  Bottom Layer w20: R14.1 6645,4080 H2.6
NetH2_7: H2.7 R15.1 | length 177.4
  Bottom Layer w20: R15.1 6630,3965 H2.7
NetH2_8: H2.8 R16.1 | length 178.6
  Bottom Layer w20: R16.1 6615,3850 H2.8
NetH3_1: H3.1 R17.1 | length 184.5
  Bottom Layer w20: R17.1 6630,5530 H3.1
NetH3_2: H3.2 R18.1 | length 180.4
  Bottom Layer w20: R18.1 6640,5420 H3.2
NetH3_3: H3.3 R19.1 | length 176.2
  Bottom Layer w20: R19.1 6650,5310 H3.3
NetH3_4: H3.4 R20.1 | length 172.1
  Bottom Layer w20: R20.1 6660,5200 H3.4
NetH3_5: H3.5 R21.1 | length 172.1
  Bottom Layer w20: R21.1 6660,5090 H3.5
NetH3_6: H3.6 R22.1 | length 176.2
  Bottom Layer w20: R22.1 6650,4980 H3.6
NetH3_7: H3.7 R23.1 | length 145
  Bottom Layer w20: R23.1 H3.7@6640,4870
NetH3_8: H3.8 R24.1 | length 182.4
  Bottom Layer w20: R24.1 6635,4765 H3.8
NetH4_1: H4.1 R25.1 | length 177.4
  Bottom Layer w20: R25.1 6630,6440 H4.1
NetH4_2: H4.2 R26.1 | length 175.4
  Bottom Layer w20: R26.1 6635,6335 H4.2
NetH4_3: H4.3 R27.1 | length 150
  Bottom Layer w20: R27.1 H4.3@6645,6225
NetH4_4: H4.4 R28.1 | length 160
  Bottom Layer w20: R28.1 H4.4@6655,6115
NetH4_5: H4.5 R29.1 | length 160
  Bottom Layer w20: R29.1 H4.5@6655,6005
NetH4_6: H4.6 R30.1 | length 171.2
  Bottom Layer w20: R30.1 6645,5895 H4.6
NetH4_7: H4.7 R31.1 | length 175.4
  Bottom Layer w20: R31.1 6635,5785 H4.7
NetH4_8: H4.8 R32.1 | length 179.5
  Bottom Layer w20: R32.1 6625,5675 H4.8
NetH5_1: H5.1 R33.1 | length 164.5
  Bottom Layer w20: R33.1 6625,7350 H5.1
NetH5_2: H5.2 R34.1 | length 160.4
  Bottom Layer w20: R34.1 6635,7240 H5.2
NetH5_3: H5.3 R35.1 | length 161.2
  Bottom Layer w20: R35.1 6645,7130 H5.3
NetH5_4: H5.4 R36.1 | length 157.1
  Bottom Layer w20: R36.1 6655,7020 H5.4
NetH5_5: H5.5 R37.1 | length 164.1
  Bottom Layer w20: R37.1 6650,6905 H5.5
NetH5_6: H5.6 R38.1 | length 168.3
  Bottom Layer w20: R38.1 6640,6795 H5.6
NetH5_7: H5.7 R39.1 | length 172.4
  Bottom Layer w20: R39.1 6630,6685 H5.7
NetH5_8: H5.8 R40.1 | length 174.5
  Bottom Layer w20: R40.1 6625,6580 H5.8
NetH6_1: H6.1 R41.1 | length 145.4
  Bottom Layer w20: H6.1 2050,6945 R41.1
NetH6_2: H6.2 R42.1 | length 141.2
  Bottom Layer w20: H6.2 2040,7055 R42.1
NetH6_3: H6.3 R43.1 | length 130
  Bottom Layer w20: H6.3 R43.1@2155,7170
NetH6_4: H6.4 R44.1 | length 135
  Bottom Layer w20: H6.4 R44.1
NetH6_5: H6.5 R45.1 | length 120
  Bottom Layer w20: H6.5@2040,7385 R45.1
NetH6_6: H6.6 R46.1 | length 143.3
  Bottom Layer w20: H6.6 2045,7490 R46.1
NetH6_7: H6.7 R47.1 | length 145.4
  Bottom Layer w20: H6.7 2050,7595 R47.1
NetH6_8: H6.8 R48.1 | length 149.5
  Bottom Layer w20: H6.8 2060,7705 R48.1
NetH7_1: H7.1 R49.1 | length 154.5
  Bottom Layer w20: H7.1 2055,6050 R49.1
NetH7_2: H7.2 R50.1 | length 150.4
  Bottom Layer w20: H7.2 2045,6160 R50.1
NetH7_3: H7.3 R51.1 | length 146.2
  Bottom Layer w20: H7.3 2035,6270 R51.1
NetH7_4: H7.4 R52.1 | length 142.1
  Bottom Layer w20: H7.4 2025,6380 R52.1
NetH7_5: H7.5 R53.1 | length 142.1
  Bottom Layer w20: H7.5 2025,6490 R53.1
NetH7_6: H7.6 R54.1 | length 146.2
  Bottom Layer w20: H7.6 2035,6600 R54.1
NetH7_7: H7.7 R55.1 | length 154.5
  Bottom Layer w20: H7.7 2055,6720 R55.1
NetH7_8: H7.8 R56.1 | length 160.7
  Bottom Layer w20: H7.8 2070,6835 R56.1
NetH8_1: H8.1 R57.1 | length 163.6
  Bottom Layer w20: H8.1 2065,5170 R57.1
NetH8_2: H8.2 R58.1 | length 161.6
  Bottom Layer w20: H8.2 2060,5275 R58.1
NetH8_3: H8.3 R59.1 | length 157.4
  Bottom Layer w20: H8.3 2050,5385 R59.1
NetH8_4: H8.4 R60.1 | length 146.2
  Bottom Layer w20: H8.4 2035,5500 R60.1
NetH8_5: H8.5 R61.1 | length 135
  Bottom Layer w20: H8.5@2025,5610 R61.1
NetH8_6: H8.6 R62.1 | length 144.1
  Bottom Layer w20: H8.6 2030,5725 R62.1
NetH8_7: H8.7 R63.1 | length 120
  Bottom Layer w20: H8.7@2040,5835 R63.1
NetH8_8: H8.8 R64.1 | length 150.4
  Bottom Layer w20: H8.8 2045,5940 R64.1
NetH9_1: H9.1 R65.1 | length 158.3
  Bottom Layer w20: H9.1 2035,4325 R65.1
NetH9_2: H9.2 R66.1 | length 154.1
  Bottom Layer w20: H9.2 2025,4435 R66.1
NetH9_3: H9.3 R67.1 | length 152.1
  Bottom Layer w20: H9.3 2020,4540 R67.1
NetH9_4: H9.4 R68.1 | length 150
  Bottom Layer w20: H9.4 R68.1
NetH9_5: H9.5 R69.1 | length 152.1
  Bottom Layer w20: H9.5 2020,4750 R69.1
NetH9_6: H9.6 R70.1 | length 154.1
  Bottom Layer w20: H9.6 2025,4855 R70.1
NetH9_7: H9.7 R71.1 | length 156.2
  Bottom Layer w20: H9.7 2030,4960 R71.1
NetH9_8: H9.8 R72.1 | length 158.3
  Bottom Layer w20: H9.8 2035,5065 R72.1
NetQ1_2: Q1.2 R1.2 | length 120
  Bottom Layer w20: Q1.2 R1.2
NetQ2_2: Q2.2 R2.2 | length 115
  Bottom Layer w20: Q2.2 R2.2
NetQ3_2: Q3.2 R3.2 | length 100
  Bottom Layer w20: Q3.2 R3.2
NetQ4_2: Q4.2 R4.2 | length 100
  Bottom Layer w20: Q4.2 R4.2
NetQ5_2: Q5.2 R5.2 | length 110
  Bottom Layer w20: Q5.2 R5.2
NetQ6_2: Q6.2 R6.2 | length 105
  Bottom Layer w20: Q6.2 R6.2
NetQ7_2: Q7.2 R7.2 | length 110
  Bottom Layer w20: Q7.2 R7.2
NetQ8_2: Q8.2 R8.2 | length 100
  Bottom Layer w20: Q8.2 R8.2
ROW0C: R1.1 U10.2 | length 667.7
  Bottom Layer w20: R1.1 3230,3765 3230,3465 U10.2
ROW0POW: H10.8 Q1.1 | length 619.4
  Bottom Layer w20: H10.8 2285,3835 2380,3740 Q1.1
ROW1C: R2.1 U10.5 | length 615.6
  Bottom Layer w20: R2.1 3060,3515 3225,3350 3225,3170 U10.5
ROW1POW: H10.7 Q2.1 | length 725.8
  Bottom Layer w20: H10.7 2260,3735 Q2.1
ROW2C: R3.1 U10.6 | length 375.6
  Bottom Layer w20: R3.1 3060,3235 U10.6
ROW2POW: H10.6 Q3.1 | length 799
  Bottom Layer w20: H10.6@2035,3635 Q3.1
ROW3C: R4.1 U10.9 | length 367.7
  Bottom Layer w20: R4.1 U10.9
ROW3POW: H10.5 Q4.1 | length 1032.8
  Bottom Layer w20: H10.5 2045,3535 2465,3115 2465,2890 Q4.1
ROW4C: R5.1 U10.19 | length 1410.8
  Bottom Layer w20: R5.1 3055,2535 3120,2470 3340,2470 3390,2520 3390,3155 U10.19
ROW4POW: H10.4 Q5.1 | length 1272.8
  Bottom Layer w20: H10.4 2045,3435 2400,3080 2400,2615 Q5.1
ROW5C: R6.1 U10.16 | length 1148.3
  Bottom Layer w20: R6.1 3245,2275 3440,2470 3440,2905 U10.16
ROW5POW: H10.3 Q6.1 | length 1552.6
  Bottom Layer w20: H10.3 2050,3335 2330,3055 2330,2275 2515,2090 Q6.1
ROW6C: R7.1 U10.15 | length 1346.9
  Bottom Layer w20: R7.1 3200,1950 3490,2240 3490,2855 U10.15
ROW6POW: H10.2 Q7.1 | length 1807
  Bottom Layer w20: 2055,3235 2055,3210 2270,2995 2270,1900 2410,1760 Q7.1
ROW7C: R8.1 U10.12 | length 1307
  Bottom Layer w20: R8.1 3540,2090 3540,2605 U10.12
ROW7POW: H10.1 Q8.1 | length 1950.2
  Bottom Layer w20: H10.1 2190,2960 2190,1830 Q8.1
VCC: C1.1 C2.1 C3.1 C4.2 C5.2 C6.2 C7.2 C8.2 C9.2 C10.2 C11.2 C12.2 C13.2 C14.2 H1.2 Q1.3 Q2.3 Q3.3 Q4.3 Q5.3 Q6.3 Q7.3 Q8.3 R73.2 SHEILD1.5 U1.16 U2.20 U3.20 U4.20 U5.20 U6.20 U7.20 U8.20 U9.20 U10.20 | length 21146
  Top Layer w40: U7.20 2890,6585 C10.2 2700,6495 ; U8.20 2875,5720 C11.2 2790,5635 2700,5635 ; U6.20 2865,7375 C9.2 2700,7260 2700,6495 ; H1.2 3621.58,915 R73.2 ; C1.1@3546.82,1293.18 C1.1 3530,1500 C2.1 ; U10.20 3515,3580 C14.2 3110,4055 2895,4055 C3.1 2750,4265 2680,4335 2680,4685 C12.2 2840,4780 U9.20 2700,5100 2700,5635 ; SHEILD1.5 R73.2 ; U1.16 5735,3255 C13.2 5995,3515 ; U2.20 5780,4105 ; U3.20 5780,5015 ; U4.20 U4.20@5760,5890 ; C7.2 U4.20@5760,5890 ; C5.2 5780,4105 ; C8.2 5845,6845 U5.20 5995,6525 5995,5890 ; C6.2 5780,5015 ; 2700,5635 2700,6495 ; R73.2 C4.2 5355,1840 5810,2295 6290,2295 6490,2495 6490,3020 5995,3515 ; U4.20@5760,5890 5995,5890 ; 5780,4105 5930,4105 5995,4170 ; 5780,5015 5995,5015 ; 5995,3515 5995,4170 ; 5995,4170 5995,5015 ; 5995,5015 5995,5890
  Top Layer w60: C3.1 2750,3775 Q1.3 2770,3685 2770,3445 Q2.3 2770,3345 2770,3120 Q3.3 2770,3020 2770,2815 Q4.3 2770,2705 2770,2475 Q5.3 2765,2370 2765,2140 Q6.3 2765,2040 2765,1810 Q7.3 2765,1710 2765,1475 Q8.3 3415,1425 C1.1 ; H1.2 C1.1@3546.82,1293.18
pads on no net: SHEILD1.1 SHEILD1.2 SHEILD1.3 SHEILD1.4 SHEILD1.8 SHEILD1.10 SHEILD1.11 SHEILD1.12 SHEILD1.13 SHEILD1.15 SHEILD1.16 SHEILD1.29 SHEILD1.30 SHEILD1.31 SHEILD1.32 SHEILD1.33 SHEILD1.34 SHEILD1.35 SHEILD1.36 SHEILD1.37 SHEILD1.38 SHEILD1.39 SHEILD1.40 SHEILD1.41 SHEILD1.42
copper on no net: | length 800
  Bottom Layer w20: 1800,640 1800,540 1900,540 ; 1800,7700 1800,7800 1900,7800 ; 6700,540 6800,540 6800,640 ; 6700,7800 6800,7800 6800,7700

## Polygon pours and split planes (outlines as drawn)
GND on Bottom Layer "GND plane" (solid, remove dead copper, pour order 4): 6800,540 6800,7800 1800,7800 1800,540

## Other copper
Top Layer:
  text "5V INPUT" at 3250,575 h60
Bottom Layer:
  text "-" at 3320,700 h60
  text "+" at 3525,700 h60

## Text inside footprints (layer, text, board x,y; h text height)
SHEILD1: Top Overlay "ICSP" at 6300,1910 h60; Top Overlay "POWER" at 5195,960 h60; Top Overlay "ANALOG" at 5915,920 h60; Top Overlay "DIGITAL (- PWM)" at 5100,2410 h60; Top Overlay "IO/REF" at 5065,805 h20 r90; Top Overlay "RESET" at 5165,805 h20 r90; Top Overlay "3V3" at 5265,800 h20 r90; Top Overlay "5V" at 5365,805 h20 r90; Top Overlay "GND" at 5465,805 h20 r90; Top Overlay "GND" at 5565,805 h20 r90; Top Overlay "VIN" at 5665,805 h20 r90; Top Overlay "A0" at 5865,805 h20 r90; Top Overlay "A1" at 5965,805 h20 r90; Top Overlay "A2" at 6065,805 h20 r90; Top Overlay "A3" at 6165,805 h20 r90; Top Overlay "A4" at 6265,805 h20 r90; Top Overlay "A5" at 6365,805 h20 r90; Top Overlay "1" at 6265,2555 h20 r90; Top Overlay "2" at 6160,2550 h20 r90; Top Overlay "3" at 6060,2550 h20 r90; Top Overlay "4" at 5960,2550 h20 r90; Top Overlay "5" at 5860,2550 h20 r90; Top Overlay "6" at 5760,2550 h20 r90; Top Overlay "7" at 5665,2550 h20 r90; Top Overlay "8" at 5505,2550 h20 r90; Top Overlay "9" at 5405,2550 h20 r90; Top Overlay "10" at 5305,2530 h20 r90; Top Overlay "11" at 5205,2535 h20 r90; Top Overlay "12" at 5105,2530 h20 r90; Top Overlay "13" at 5005,2530 h20 r90; Top Overlay "GND" at 4910,2510 h20 r90; Top Overlay "AREF" at 4805,2490 h20 r90; Top Overlay "SDA" at 4705,2510 h20 r90; Top Overlay "ACL" at 4605,2510 h20 r90; Top Overlay "0" at 6365,2550 h20 r90